# EAGLE board femtoBeacon_r2.0.2_PANEL_1x5 (EAGLE 7.6.0), part 1 of 2
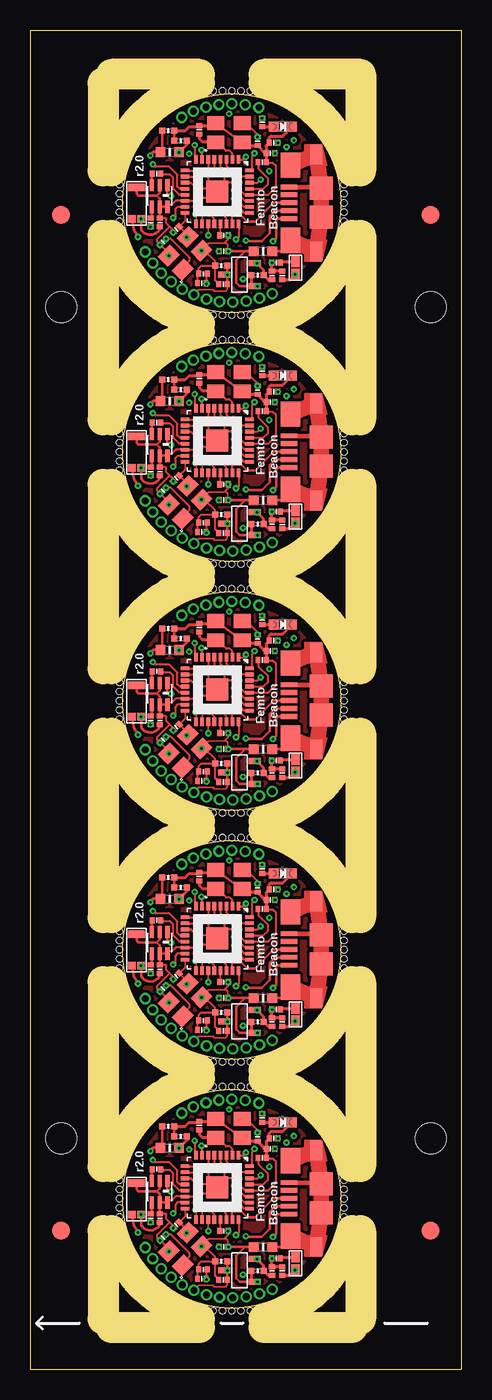
[diagram p0: board, top side]
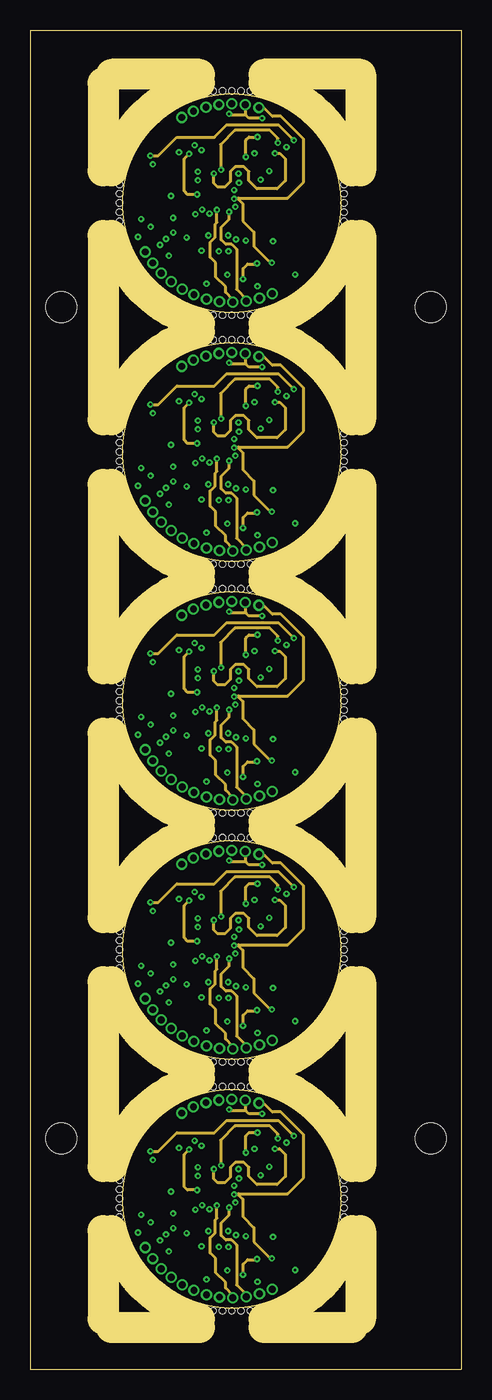
[diagram p1: board, inner layer Route2]
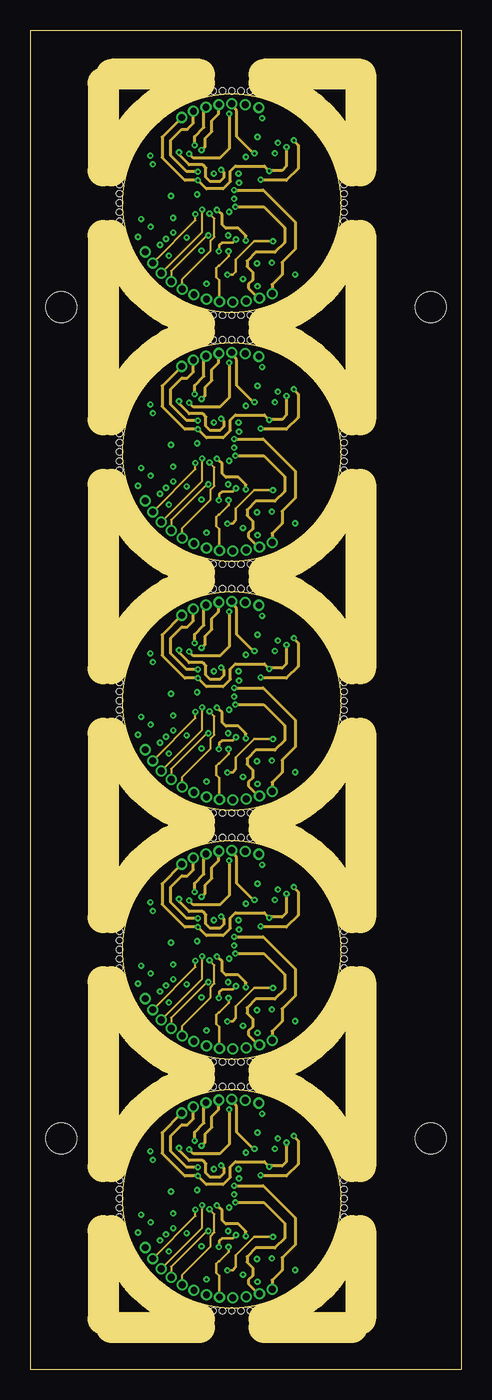
[diagram p2: board, inner layer Route15]
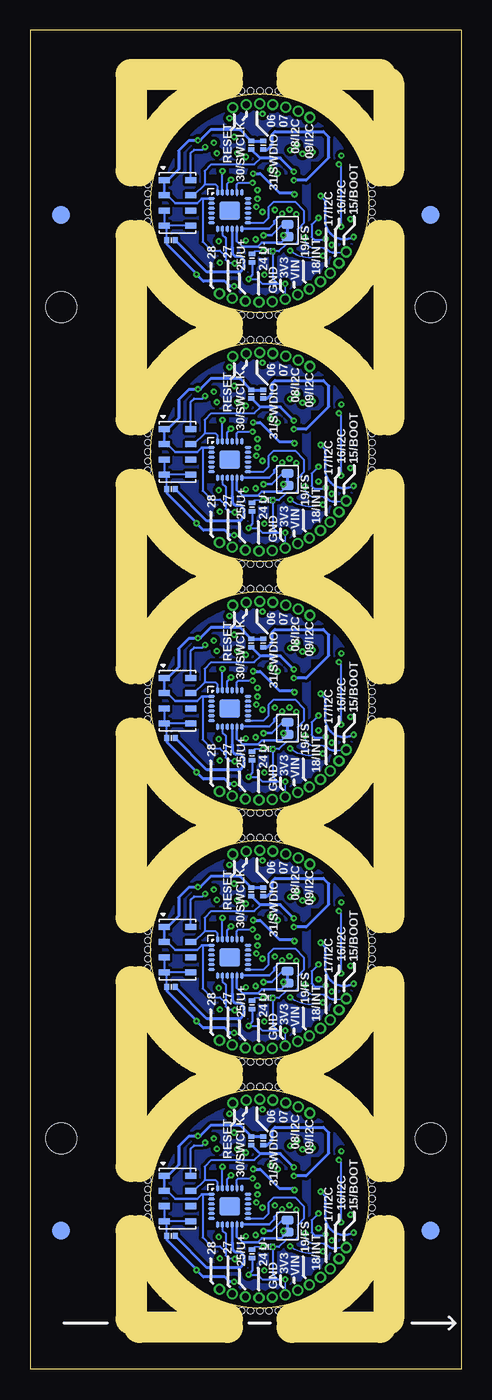
[diagram p3: board, bottom side, seen from below]

Size 35.56 x 110.49 mm. Coordinates in mm from the lower left corner, seen from the top.
Outline: 35.56,110.49 35.56,0 0,0 0,110.49 35.56,110.49
Outline: circle at 16.62,14.08 radius 9
Outline: circle at 16.62,34.62 radius 9
Outline: circle at 16.62,55.16 radius 9
Outline: circle at 16.62,75.7 radius 9
Outline: circle at 16.62,96.24 radius 9
Copper layers (1+2*15+16): Top 0.035mm / dielectric 0.7mm / Route2 0.035mm / dielectric 0.15mm / Route15 0.035mm / dielectric 0.2mm / Bottom 0.035mm
Design rules "AQS_custom_4layer": minimum track width 5mil, minimum drill 5mil, track to track 6mil, track to pad 6mil, pad to pad 6mil, via to via 6mil, smd to smd 1mil, copper to edge 15mil, drill to drill 6mil, minimum pad ring 7mil, minimum via ring 3mil, stop-mask expansion 2mil, vias tented up to drill 10mil, thermal gap 10mil
Holes 2.54 mm at 2.54,87.63 2.54,19.05 33.02,87.63 33.02,19.05
Holes 0.51 mm at 7.37,14.08 7.37,14.84 7.37,15.6 7.37,13.32 7.37,12.56 25.87,14.08 25.87,13.32 25.87,12.56 25.87,14.84 25.87,15.6 16.62,4.83 15.86,4.83 15.1,4.83 17.38,4.83 18.14,4.83 16.62,23.33 17.38,23.33 18.14,23.33 15.86,23.33 15.1,23.33 7.37,34.62 7.37,35.38 7.37,36.14 7.37,33.86 7.37,33.1 25.87,34.62 25.87,33.86 25.87,33.1 25.87,35.38 25.87,36.14 16.62,25.37 15.86,25.37 15.1,25.37 17.38,25.37 18.14,25.37 16.62,43.87 17.38,43.87 18.14,43.87 15.86,43.87 15.1,43.87 7.37,55.16 7.37,55.92 7.37,56.68 7.37,54.4 7.37,53.64 25.87,55.16 25.87,54.4 25.87,53.64 25.87,55.92 25.87,56.68 16.62,45.91 15.86,45.91 15.1,45.91 17.38,45.91 18.14,45.91 16.62,64.41 17.38,64.41 18.14,64.41 15.86,64.41 15.1,64.41 7.37,75.7 7.37,76.46 7.37,77.22 7.37,74.94 7.37,74.18 25.87,75.7 25.87,74.94 25.87,74.18 25.87,76.46 25.87,77.22 16.62,66.45 15.86,66.45 15.1,66.45 17.38,66.45 18.14,66.45 16.62,84.95 17.38,84.95 18.14,84.95 15.86,84.95 15.1,84.95 7.37,96.24 7.37,97 7.37,97.76 7.37,95.48 7.37,94.72 25.87,96.24 25.87,95.48 25.87,94.72 25.87,97 25.87,97.76 16.62,86.99 15.86,86.99 15.1,86.99 17.38,86.99 18.14,86.99 16.62,105.49 17.38,105.49 18.14,105.49 15.86,105.49 15.1,105.49
Milling: 36 lines

## Footprints (pad centres in the part's own frame; a part is rotated, then mirrored left to right if it is on the bottom)
ANT_BAR = smd 0.62 x 0.61: 1 -1.3,0.37; 2 -1.3,-0.38 | smd 0.62 x 1.36: 3 1.3,0
0805_BALUN = smd 1 x 0.35: 1 -0.9,0.65; 2 -0.9,0; 3 -0.9,-0.65; 4 0.9,-0.65; 5 0.9,0; 6 0.9,0.65
MS5611-01BA03 = smd 0.9 x 0.5: 1 -1.1,1.875; 2 -1.1,0.625; 3 -1.1,-0.625; 4 -1.1,-1.875; 5 1.1,-1.875; 6 1.1,-0.625; 7 1.1,0.625; 8 1.1,1.875
SPST_SMD = smd 0.889 x 0.699: 1 -0.508,0; 2 0.508,0
PART = smd 0.4 x 0.5: 1 -0.35,0; 2 0.35,0
_0402MP = smd 0.5 x 0.5: 1 -0.508,0; 2 0.508,0
_0603MP = smd 0.8 x 0.8: 1 -0.762,0; 2 0.762,0
FIDUCIAL_1MM = smd 1.5 x 1.5: 1 0,0
QFN32 = smd 0.7 x 0.3: 1 -2.65,1.75; 2 -2.65,1.25; 3 -2.65,0.75; 4 -2.65,0.25; 5 -2.65,-0.25; 6 -2.65,-0.75; 7 -2.65,-1.25; 8 -2.65,-1.75; 17 2.65,-1.75; 18 2.65,-1.25; 19 2.65,-0.75; 20 2.65,-0.25; 21 2.65,0.25; 22 2.65,0.75; 23 2.65,1.25; 24 2.65,1.75 | smd 0.3 x 0.7: 9 -1.75,-2.65; 10 -1.25,-2.65; 11 -0.75,-2.65; 12 -0.25,-2.65; 13 0.25,-2.65; 14 0.75,-2.65; 15 1.25,-2.65; 16 1.75,-2.65; 25 1.75,2.65; 26 1.25,2.65; 27 0.75,2.65; 28 0.25,2.65; 29 -0.25,2.65; 30 -0.75,2.65; 31 -1.25,2.65; 32 -1.75,2.65 | smd 1.8 x 1.8: 33 0,0
QFN_3X3MM = smd 0.6 x 0.25: P$1 -1.5,1; P$2 -1.5,0.6; P$3 -1.5,0.2; P$4 -1.5,-0.2; P$5 -1.5,-0.6; P$6 -1.5,-1; P$13 1.5,-1; P$14 1.5,-0.6; P$15 1.5,-0.2; P$16 1.5,0.2; P$17 1.5,0.6; P$18 1.5,1 | smd 0.25 x 0.6: P$7 -1,-1.5; P$8 -0.6,-1.5; P$9 -0.2,-1.5; P$10 0.2,-1.5; P$11 0.6,-1.5; P$12 1,-1.5; P$19 1,1.5; P$20 0.6,1.5; P$21 0.2,1.5; P$22 -0.2,1.5; P$23 -0.6,1.5; P$24 -1,1.5 | smd 1.7 x 1.54: P$25 0,0
MCP1700T-3302E/TT = smd 0.5 x 1: GND -0.95,-1.25; VIN 0,1.25; VOUT 0.95,-1.25
CHIPLED_0603_NOOUTLINE = smd 0.8 x 0.8: A 0,-0.75; C 0,0.75
SOLDER_JUMP_CLOSED = smd 0.762 x 1.016: 1 -0.508,0; 2 0.508,0
1X1_ROUND = drill 0.559 pad 0.864: P$1 0,0
USB_MICROB_PACKAGE = smd 0.4 x 1.35: 1 -1.3,1.47; 2 -0.64,1.47; 3 0,1.47; 4 0.66,1.47; 5 1.3,1.47 | smd 2.1 x 1.6: 6 -3.1,1.35; 11 3.1,1.35 | smd 1.6 x 1: 7 -4,-0.8; 10 4,-0.8 | smd 1.9 x 1.9: 8 -1.2,-1.2; 9 1.2,-1.2
TSX-3225 = smd 1.4 x 1.15: 1 -1.1,-0.8; 2 1.1,-0.8; 3 1.1,0.8; 4 -1.1,0.8

## Placement (x,y rotation side)
ANT1  PULSE_ANT_2.4GHZ  [ANT_BAR]  8.76,14.05 90 top
ANT2  PULSE_ANT_2.4GHZ  [ANT_BAR]  8.76,34.59 90 top
ANT3  PULSE_ANT_2.4GHZ  [ANT_BAR]  8.76,55.13 90 top
ANT4  PULSE_ANT_2.4GHZ  [ANT_BAR]  8.76,75.67 90 top
ANT5  PULSE_ANT_2.4GHZ  [ANT_BAR]  8.76,96.21 90 top
BAL  JOHANSON_2450BM15A0015E  [0805_BALUN]  10.67,14.66 270 top
BAL1  JOHANSON_2450BM15A0015E  [0805_BALUN]  10.67,35.2 270 top
BAL2  JOHANSON_2450BM15A0015E  [0805_BALUN]  10.67,55.74 270 top
BAL3  JOHANSON_2450BM15A0015E  [0805_BALUN]  10.67,76.28 270 top
BAL4  JOHANSON_2450BM15A0015E  [0805_BALUN]  10.67,96.82 270 top
BARO  MS5611-01BA03  [MS5611-01BA03]  23.41,14.09 0 bottom
BARO1  MS5611-01BA03  [MS5611-01BA03]  23.41,34.63 0 bottom
BARO2  MS5611-01BA03  [MS5611-01BA03]  23.41,55.17 0 bottom
BARO3  MS5611-01BA03  [MS5611-01BA03]  23.41,75.71 0 bottom
BARO4  MS5611-01BA03  [MS5611-01BA03]  23.41,96.25 0 bottom
BTN  DNP  [SPST_SMD]  21.87,8.74 270 top
BTN1  DNP  [SPST_SMD]  21.87,29.28 270 top
BTN2  DNP  [SPST_SMD]  21.87,49.82 270 top
BTN3  DNP  [SPST_SMD]  21.87,70.36 270 top
BTN4  DNP  [SPST_SMD]  21.87,90.9 270 top
C1  0.1uF  [PART]  20.78,8.1 270 top
C2  0.1uF  [PART]  15.98,11.4 0 top
C3  10pF  [PART]  10.95,10.87 45 top
C4  10pF  [PART]  12.04,11.89 225 top
C5  2.2uF  [_0402MP]  18.75,8.13 180 top
C6  2.2uF  [_0402MP]  15.75,8.91 180 top
C7  0.47uF  [PART]  15.9,7.39 180 top
C8  0.1uF  [PART]  20.07,19.05 180 top
C9  0.1uF  [PART]  19.13,17.45 0 top
C10  0.1uF  [PART]  14.25,8.23 180 top
C11  22pF, C0G, 5%  [PART]  10.41,16.51 180 top
C12  22pF, C0G, 5%  [PART]  9.93,12.47 90 top
C13  DNP  [PART]  10.69,12.47 90 top
C14  9pF  [PART]  13.94,20.12 270 top
C15  9pF  [PART]  18.75,19.18 270 top
C16  0.1uF  [PART]  15.95,10.1 0 top
C17  0.1uF  [PART]  19.81,18.19 180 top
C18  0.1uF  [PART]  20.78,28.64 270 top
C19  0.1uF  [PART]  15.98,31.94 0 top
C20  2.2uF  [_0402MP]  18.75,28.67 180 top
C21  10uF  [_0402MP]  11.38,20.04 180 top
C22  10uF  [_0402MP]  12.4,19.2 0 top
C23  2.2uF  [_0402MP]  15.75,29.45 180 top
C24  0.47uF  [PART]  15.9,27.93 180 top
C25  0.1uF  [PART]  17.27,30.07 90 bottom
C26  0.1uF  [PART]  20.07,39.59 180 top
C27  0.1uF  [PART]  19.13,37.99 0 top
C28  0.1uF  [PART]  15.95,30.64 0 top
C29  0.1uF  [PART]  17.27,9.53 90 bottom
C30  0.1uF  [PART]  15.95,10.1 0 bottom
C31  10nF  [PART]  14.15,7.47 0 top
C32  0.1uF  [PART]  23.95,11 180 bottom
C33  0.1uF  [PART]  19.81,38.73 180 top
C34  10uF  [_0402MP]  11.38,40.58 180 top
C35  10uF  [_0402MP]  12.4,39.74 0 top
C36  0.1uF  [PART]  14.25,28.77 180 top
C37  10pF  [PART]  10.95,31.41 45 top
C38  10pF  [PART]  12.04,32.43 225 top
C39  22pF, C0G, 5%  [PART]  10.41,37.05 180 top
C40  22pF, C0G, 5%  [PART]  9.93,33.01 90 top
C41  DNP  [PART]  10.69,33.01 90 top
C42  9pF  [PART]  13.94,40.66 270 top
C43  9pF  [PART]  18.75,39.72 270 top
C44  10nF  [PART]  14.15,28.01 0 top
C45  0.1uF  [PART]  15.95,30.64 0 bottom
C46  0.1uF  [PART]  23.95,31.54 180 bottom
C47  0.1uF  [PART]  20.78,49.18 270 top
C48  0.1uF  [PART]  15.98,52.48 0 top
C49  2.2uF  [_0402MP]  18.75,49.21 180 top
C50  2.2uF  [_0402MP]  15.75,49.99 180 top
C51  0.47uF  [PART]  15.9,48.47 180 top
C52  0.1uF  [PART]  17.27,50.61 90 bottom
C53  0.1uF  [PART]  20.07,60.13 180 top
C54  0.1uF  [PART]  19.13,58.53 0 top
C55  0.1uF  [PART]  15.95,51.18 0 top
C56  0.1uF  [PART]  19.81,59.27 180 top
C57  10uF  [_0402MP]  11.38,61.12 180 top
C58  10uF  [_0402MP]  12.4,60.28 0 top
C59  0.1uF  [PART]  14.25,49.31 180 top
C60  10pF  [PART]  10.95,51.95 45 top
C61  10pF  [PART]  12.04,52.97 225 top
C62  22pF, C0G, 5%  [PART]  10.41,57.59 180 top
C63  22pF, C0G, 5%  [PART]  9.93,53.55 90 top
C64  DNP  [PART]  10.69,53.55 90 top
C65  9pF  [PART]  13.94,61.2 270 top
C66  9pF  [PART]  18.75,60.26 270 top
C67  10nF  [PART]  14.15,48.55 0 top
C68  0.1uF  [PART]  15.95,51.18 0 bottom
C69  0.1uF  [PART]  23.95,52.08 180 bottom
C70  0.1uF  [PART]  20.78,69.72 270 top
C71  0.1uF  [PART]  15.98,73.02 0 top
C72  2.2uF  [_0402MP]  18.75,69.75 180 top
C73  2.2uF  [_0402MP]  15.75,70.53 180 top
C74  0.47uF  [PART]  15.9,69.01 180 top
C75  0.1uF  [PART]  17.27,71.15 90 bottom
C76  0.1uF  [PART]  20.07,80.67 180 top
C77  0.1uF  [PART]  19.13,79.07 0 top
C78  0.1uF  [PART]  15.95,71.72 0 top
C79  0.1uF  [PART]  19.81,79.81 180 top
C80  10uF  [_0402MP]  11.38,81.66 180 top
C81  10uF  [_0402MP]  12.4,80.82 0 top
C82  0.1uF  [PART]  14.25,69.85 180 top
C83  10pF  [PART]  10.95,72.49 45 top
C84  10pF  [PART]  12.04,73.51 225 top
C85  22pF, C0G, 5%  [PART]  10.41,78.13 180 top
C86  22pF, C0G, 5%  [PART]  9.93,74.09 90 top
C87  DNP  [PART]  10.69,74.09 90 top
C88  9pF  [PART]  13.94,81.74 270 top
C89  9pF  [PART]  18.75,80.8 270 top
C90  10nF  [PART]  14.15,69.09 0 top
C91  0.1uF  [PART]  15.95,71.72 0 bottom
C92  0.1uF  [PART]  23.95,72.62 180 bottom
C93  0.1uF  [PART]  20.78,90.26 270 top
C94  0.1uF  [PART]  15.98,93.56 0 top
C95  2.2uF  [_0402MP]  18.75,90.29 180 top
C96  2.2uF  [_0402MP]  15.75,91.07 180 top
C97  0.47uF  [PART]  15.9,89.55 180 top
C98  0.1uF  [PART]  17.27,91.69 90 bottom
C99  0.1uF  [PART]  20.07,101.21 180 top
C100  0.1uF  [PART]  19.13,99.61 0 top
C101  0.1uF  [PART]  15.95,92.26 0 top
C102  0.1uF  [PART]  19.81,100.35 180 top
C103  10uF  [_0402MP]  11.38,102.2 180 top
C104  10uF  [_0402MP]  12.4,101.36 0 top
C105  0.1uF  [PART]  14.25,90.39 180 top
C106  10pF  [PART]  10.95,93.03 45 top
C107  10pF  [PART]  12.04,94.05 225 top
C108  22pF, C0G, 5%  [PART]  10.41,98.67 180 top
C109  22pF, C0G, 5%  [PART]  9.93,94.63 90 top
C110  DNP  [PART]  10.69,94.63 90 top
C111  9pF  [PART]  13.94,102.28 270 top
C112  9pF  [PART]  18.75,101.34 270 top
C113  10nF  [PART]  14.15,89.63 0 top
C114  0.1uF  [PART]  15.95,92.26 0 bottom
C115  0.1uF  [PART]  23.95,93.16 180 bottom
FB1  [_0603MP]  19.2,10.08 180 top
FB2  [_0603MP]  19.2,30.62 180 top
FB3  [_0603MP]  19.2,51.16 180 top
FB4  [_0603MP]  19.2,71.7 180 top
FB5  [_0603MP]  19.2,92.24 180 top
FID1  [FIDUCIAL_1MM]  2.54,11.43 0 top
FID2  [FIDUCIAL_1MM]  2.54,95.25 0 top
FID3  [FIDUCIAL_1MM]  33.02,95.25 0 top
FID4  [FIDUCIAL_1MM]  33.02,11.43 0 top
FID5  [FIDUCIAL_1MM]  2.54,11.43 0 bottom
FID6  [FIDUCIAL_1MM]  2.54,95.25 0 bottom
FID7  [FIDUCIAL_1MM]  33.02,95.25 0 bottom
FID8  [FIDUCIAL_1MM]  33.02,11.43 0 bottom
IC  ATSAMR21E18A-MUT  [QFN32]  15.43,15 270 top
IC1  ATSAMR21E18A-MUT  [QFN32]  15.43,35.54 270 top
IC2  ATSAMR21E18A-MUT  [QFN32]  15.43,56.08 270 top
IC3  ATSAMR21E18A-MUT  [QFN32]  15.43,76.62 270 top
IC4  ATSAMR21E18A-MUT  [QFN32]  15.43,97.16 270 top
IMU  MPU-9250  [QFN_3X3MM]  19.11,13.45 0 bottom
IMU1  MPU-9250  [QFN_3X3MM]  19.11,33.98 0 bottom
IMU2  MPU-9250  [QFN_3X3MM]  19.11,54.53 0 bottom
IMU3  MPU-9250  [QFN_3X3MM]  19.11,75.06 0 bottom
IMU4  MPU-9250  [QFN_3X3MM]  19.11,95.61 0 bottom
L1  10uH  [_0603MP]  11.51,38.8 0 top
L2  10uH  [_0603MP]  11.51,59.34 0 top
L3  10uH  [_0603MP]  11.51,79.88 0 top
L4  10uH  [_0603MP]  11.51,100.42 0 top
L6  10uH  [_0603MP]  11.51,18.26 0 top
LDO_VREG  MCP1700T-3302E/TT  [MCP1700T-3302E/TT]  17.26,8.15 90 top
LDO_VREG1  MCP1700T-3302E/TT  [MCP1700T-3302E/TT]  17.26,28.69 90 top
LDO_VREG2  MCP1700T-3302E/TT  [MCP1700T-3302E/TT]  17.26,49.23 90 top
LDO_VREG3  MCP1700T-3302E/TT  [MCP1700T-3302E/TT]  17.26,69.77 90 top
LDO_VREG4  MCP1700T-3302E/TT  [MCP1700T-3302E/TT]  17.26,90.31 90 top
LED1  BLUE  [CHIPLED_0603_NOOUTLINE]  20.83,40.91 270 top
LED2  BLUE  [CHIPLED_0603_NOOUTLINE]  20.83,20.37 270 top
LED3  BLUE  [CHIPLED_0603_NOOUTLINE]  20.83,61.45 270 top
LED4  BLUE  [CHIPLED_0603_NOOUTLINE]  20.83,81.99 270 top
LED5  BLUE  [CHIPLED_0603_NOOUTLINE]  20.83,102.53 270 top
R1  330  [PART]  20.27,9.14 180 top
R2  10K  [PART]  19.94,8.1 270 top
R3  330  [PART]  20.27,29.68 180 top
R4  330  [PART]  19.13,20.73 270 top
R5  10K  [PART]  19.94,28.64 270 top
R6  330  [PART]  19.13,41.27 270 top
R7  2.2K  [PART]  17.32,39.39 90 bottom
R8  2.2K  [PART]  17.32,18.85 90 bottom
R9  2.2K  [PART]  16.36,18.85 90 bottom
R10  2.2K  [PART]  16.36,39.39 90 bottom
R11  330  [PART]  20.27,50.22 180 top
R12  10K  [PART]  19.94,49.18 270 top
R13  330  [PART]  19.13,61.81 270 top
R14  2.2K  [PART]  17.32,59.93 90 bottom
R15  2.2K  [PART]  16.36,59.93 90 bottom
R16  330  [PART]  20.27,70.76 180 top
R17  10K  [PART]  19.94,69.72 270 top
R18  330  [PART]  19.13,82.35 270 top
R19  2.2K  [PART]  17.32,80.47 90 bottom
R20  2.2K  [PART]  16.36,80.47 90 bottom
R21  330  [PART]  20.27,91.3 180 top
R22  10K  [PART]  19.94,90.26 270 top
R23  330  [PART]  19.13,102.89 270 top
R24  2.2K  [PART]  17.32,101.01 90 bottom
R25  2.2K  [PART]  16.36,101.01 90 bottom
SJ1  SOLDER_JUMPER_CLOSED  [SOLDER_JUMP_CLOSED]  14.35,11.81 270 bottom
SJ2  SOLDER_JUMPER_CLOSED  [SOLDER_JUMP_CLOSED]  14.35,32.35 270 bottom
SJ3  SOLDER_JUMPER_CLOSED  [SOLDER_JUMP_CLOSED]  14.35,52.89 270 bottom
SJ4  SOLDER_JUMPER_CLOSED  [SOLDER_JUMP_CLOSED]  14.35,73.43 270 bottom
SJ5  SOLDER_JUMPER_CLOSED  [SOLDER_JUMP_CLOSED]  14.35,93.97 270 bottom
U$1  1X1_ROUND  [1X1_ROUND]  13.5,6.51 0 top
U$2  1X1_ROUND  [1X1_ROUND]  15.6,5.95 0 top
U$3  1X1_ROUND  [1X1_ROUND]  13.5,27.05 0 top
U$4  1X1_ROUND  [1X1_ROUND]  15.6,26.49 0 top
U$5  1X1_ROUND  [1X1_ROUND]  14.54,6.15 0 top
U$6  1X1_ROUND  [1X1_ROUND]  14.54,26.69 0 top
U$7  1X1_ROUND  [1X1_ROUND]  18.91,6.23 0 top
U$8  1X1_ROUND  [1X1_ROUND]  12.53,27.52 0 top
U$9  1X1_ROUND  [1X1_ROUND]  16.7,5.89 0 top
U$10  1X1_ROUND  [1X1_ROUND]  17.81,5.97 0 top
U$11  1X1_ROUND  [1X1_ROUND]  11.62,28.12 0 top
U$12  1X1_ROUND  [1X1_ROUND]  10.81,28.83 0 top
U$13  1X1_ROUND  [1X1_ROUND]  10.1,29.67 0 top
U$14  1X1_ROUND  [1X1_ROUND]  9.49,30.58 0 top
U$15  1X1_ROUND  [1X1_ROUND]  12.49,41.68 0 top
U$16  1X1_ROUND  [1X1_ROUND]  13.46,42.18 0 top
U$17  1X1_ROUND  [1X1_ROUND]  14.49,42.53 0 top
U$18  1X1_ROUND  [1X1_ROUND]  18.86,42.5 0 top
U$19  1X1_ROUND  [1X1_ROUND]  17.74,42.72 0 top
U$20  1X1_ROUND  [1X1_ROUND]  16.62,42.82 0 top
U$21  1X1_ROUND  [1X1_ROUND]  18.91,26.77 0 top
U$22  1X1_ROUND  [1X1_ROUND]  19.95,27.14 0 top
U$23  1X1_ROUND  [1X1_ROUND]  15.56,42.75 0 top
U$24  1X1_ROUND  [1X1_ROUND]  16.7,26.43 0 top
U$25  1X1_ROUND  [1X1_ROUND]  17.81,26.51 0 top
U$26  1X1_ROUND  [1X1_ROUND]  13.5,47.59 0 top
U$27  1X1_ROUND  [1X1_ROUND]  15.6,47.03 0 top
U$28  1X1_ROUND  [1X1_ROUND]  14.54,47.23 0 top
U$29  1X1_ROUND  [1X1_ROUND]  12.53,48.06 0 top
U$30  1X1_ROUND  [1X1_ROUND]  11.62,48.66 0 top
U$31  1X1_ROUND  [1X1_ROUND]  10.81,49.37 0 top
U$32  1X1_ROUND  [1X1_ROUND]  10.1,50.21 0 top
U$33  1X1_ROUND  [1X1_ROUND]  9.49,51.12 0 top
U$34  1X1_ROUND  [1X1_ROUND]  12.49,62.22 0 top
U$35  1X1_ROUND  [1X1_ROUND]  12.53,6.98 0 top
U$36  1X1_ROUND  [1X1_ROUND]  11.62,7.58 0 top
U$37  1X1_ROUND  [1X1_ROUND]  10.81,8.29 0 top
U$38  1X1_ROUND  [1X1_ROUND]  10.1,9.13 0 top
U$39  1X1_ROUND  [1X1_ROUND]  9.49,10.04 0 top
U$40  1X1_ROUND  [1X1_ROUND]  13.46,62.72 0 top
U$41  1X1_ROUND  [1X1_ROUND]  12.49,21.14 0 top
U$42  1X1_ROUND  [1X1_ROUND]  13.46,21.64 0 top
U$43  1X1_ROUND  [1X1_ROUND]  14.49,21.99 0 top
U$44  1X1_ROUND  [1X1_ROUND]  14.49,63.07 0 top
U$45  1X1_ROUND  [1X1_ROUND]  18.86,21.96 0 top
U$46  1X1_ROUND  [1X1_ROUND]  17.74,22.18 0 top
U$47  1X1_ROUND  [1X1_ROUND]  16.62,22.28 0 top
U$48  1X1_ROUND  [1X1_ROUND]  19.95,6.6 0 top
U$49  1X1_ROUND  [1X1_ROUND]  18.86,63.04 0 top
U$50  1X1_ROUND  [1X1_ROUND]  17.74,63.26 0 top
U$51  1X1_ROUND  [1X1_ROUND]  16.62,63.36 0 top
U$52  1X1_ROUND  [1X1_ROUND]  18.91,47.31 0 top
U$53  1X1_ROUND  [1X1_ROUND]  19.95,47.68 0 top
U$54  1X1_ROUND  [1X1_ROUND]  15.56,22.21 0 top
U$55  1X1_ROUND  [1X1_ROUND]  15.56,63.29 0 top
U$56  1X1_ROUND  [1X1_ROUND]  16.7,46.97 0 top
U$57  1X1_ROUND  [1X1_ROUND]  17.81,47.05 0 top
U$58  1X1_ROUND  [1X1_ROUND]  13.5,68.13 0 top
U$59  1X1_ROUND  [1X1_ROUND]  15.6,67.57 0 top
U$60  1X1_ROUND  [1X1_ROUND]  14.54,67.77 0 top
U$61  1X1_ROUND  [1X1_ROUND]  12.53,68.6 0 top
U$62  1X1_ROUND  [1X1_ROUND]  11.62,69.2 0 top
U$63  1X1_ROUND  [1X1_ROUND]  10.81,69.91 0 top
U$64  1X1_ROUND  [1X1_ROUND]  10.1,70.75 0 top
U$65  1X1_ROUND  [1X1_ROUND]  9.49,71.66 0 top
U$66  1X1_ROUND  [1X1_ROUND]  12.49,82.76 0 top
U$67  1X1_ROUND  [1X1_ROUND]  13.46,83.26 0 top
U$68  1X1_ROUND  [1X1_ROUND]  14.49,83.61 0 top
U$69  1X1_ROUND  [1X1_ROUND]  18.86,83.58 0 top
U$70  1X1_ROUND  [1X1_ROUND]  17.74,83.8 0 top
U$71  1X1_ROUND  [1X1_ROUND]  16.62,83.9 0 top
U$72  1X1_ROUND  [1X1_ROUND]  18.91,67.85 0 top
U$73  1X1_ROUND  [1X1_ROUND]  19.95,68.22 0 top
U$74  1X1_ROUND  [1X1_ROUND]  15.56,83.83 0 top
U$75  1X1_ROUND  [1X1_ROUND]  16.7,67.51 0 top
U$76  1X1_ROUND  [1X1_ROUND]  17.81,67.59 0 top
U$77  1X1_ROUND  [1X1_ROUND]  13.5,88.67 0 top
U$78  1X1_ROUND  [1X1_ROUND]  15.6,88.11 0 top
U$79  1X1_ROUND  [1X1_ROUND]  14.54,88.31 0 top
U$80  1X1_ROUND  [1X1_ROUND]  12.53,89.14 0 top
U$81  1X1_ROUND  [1X1_ROUND]  11.62,89.74 0 top
U$82  1X1_ROUND  [1X1_ROUND]  10.81,90.45 0 top
U$83  1X1_ROUND  [1X1_ROUND]  10.1,91.29 0 top
U$84  1X1_ROUND  [1X1_ROUND]  9.49,92.2 0 top
U$85  1X1_ROUND  [1X1_ROUND]  12.49,103.3 0 top
U$86  1X1_ROUND  [1X1_ROUND]  13.46,103.8 0 top
U$87  1X1_ROUND  [1X1_ROUND]  14.49,104.15 0 top
U$88  1X1_ROUND  [1X1_ROUND]  18.86,104.12 0 top
U$89  1X1_ROUND  [1X1_ROUND]  17.74,104.34 0 top
U$90  1X1_ROUND  [1X1_ROUND]  16.62,104.44 0 top
U$91  1X1_ROUND  [1X1_ROUND]  18.91,88.39 0 top
U$92  1X1_ROUND  [1X1_ROUND]  19.95,88.76 0 top
U$93  1X1_ROUND  [1X1_ROUND]  15.56,104.37 0 top
U$94  1X1_ROUND  [1X1_ROUND]  16.7,88.05 0 top
U$95  1X1_ROUND  [1X1_ROUND]  17.81,88.13 0 top
USB  USB_MICROB  [USB_MICROB_PACKAGE]  22.8,14.1 90 top
USB1  USB_MICROB  [USB_MICROB_PACKAGE]  22.8,34.64 90 top
USB2  USB_MICROB  [USB_MICROB_PACKAGE]  22.8,55.18 90 top
USB3  USB_MICROB  [USB_MICROB_PACKAGE]  22.8,75.72 90 top
USB4  USB_MICROB  [USB_MICROB_PACKAGE]  22.8,96.26 90 top
XOSC  12MHz  [TSX-3225]  12.78,9.93 45 top
XOSC1  12MHz  [TSX-3225]  12.78,30.47 45 top
XOSC2  12MHz  [TSX-3225]  12.78,51.01 45 top
XOSC3  12MHz  [TSX-3225]  12.78,71.55 45 top
XOSC4  12MHz  [TSX-3225]  12.78,92.09 45 top
XOSCRF  16MHz  [TSX-3225]  16.39,19.88 0 top
XOSCRF1  16MHz  [TSX-3225]  16.39,40.42 0 top
XOSCRF2  16MHz  [TSX-3225]  16.39,60.96 0 top
XOSCRF3  16MHz  [TSX-3225]  16.39,81.5 0 top
XOSCRF4  16MHz  [TSX-3225]  16.39,102.04 0 top

## Library data of the parts
ANT1-ANT5 = bar_antenna
BAL BAL1-BAL4 = balun
BARO BARO1-BARO4 = freeimu
BTN BTN1-BTN4 USB USB1-USB4 = femtoduino
C1-C4 C8-C19 C25-C33 C36-C48 C52-C56 C59-C71 C75-C79 C82-C94 C98-C102 C105-C115 = parts_0201; DIGIKEY_PART: 490-3194-1-ND
C5 C6 C20-C23 C34 C35 C49 C50 C57 C58 C72 C73 C80 C81 C95 C96 C103 C104 FB1-FB5 L1-L4 L6 LED1-LED5 = microbuilder
C7 C24 C51 C74 C97 R1-R25 = parts_0201
FID1-FID8 = adafruit
IC IC1-IC4 = atmel-samr21
IMU IMU1-IMU4 = mpu9250
LDO_VREG LDO_VREG1-LDO_VREG4 = MCP1700T-3302E_TT
SJ1-SJ5 = solder-jumpers
U$1-U$95 = pins_1.27mm_pitch
XOSC XOSC1-XOSC4 XOSCRF XOSCRF1-XOSCRF4 = crystals

## Nets
3.3V1: BARO.1 BARO.2 C5.1 C10.1 C16.1 C21.2 C29.1 C30.2 C31.2 IC.24 IC.30 IMU.P$1 IMU.P$8 IMU.P$13 IMU.P$22 L6.1 LDO_VREG.VOUT R2.2 R8.2 R9.2 U$5.P$1
3.3V2: BARO1.1 BARO1.2 C20.1 C25.1 C28.1 C34.2 C36.1 C44.2 C45.2 IC1.24 IC1.30 IMU1.P$1 IMU1.P$8 IMU1.P$13 IMU1.P$22 L1.1 LDO_VREG1.VOUT R5.2 R7.2 R10.2 U$6.P$1
3.3V3: BARO2.1 BARO2.2 C49.1 C52.1 C55.1 C57.2 C59.1 C67.2 C68.2 IC2.24 IC2.30 IMU2.P$1 IMU2.P$8 IMU2.P$13 IMU2.P$22 L2.1 LDO_VREG2.VOUT R12.2 R14.2 R15.2 U$28.P$1
3.3V4: BARO3.1 BARO3.2 C72.1 C75.1 C78.1 C80.2 C82.1 C90.2 C91.2 IC3.24 IC3.30 IMU3.P$1 IMU3.P$8 IMU3.P$13 IMU3.P$22 L3.1 LDO_VREG3.VOUT R17.2 R19.2 R20.2 U$60.P$1
3.3V5: BARO4.1 BARO4.2 C95.1 C98.1 C101.1 C103.2 C105.1 C113.2 C114.2 IC4.24 IC4.30 IMU4.P$1 IMU4.P$8 IMU4.P$13 IMU4.P$22 L4.1 LDO_VREG4.VOUT R22.2 R24.2 R25.2 U$79.P$1
ANT_OUT: ANT1.1 BAL.1
ANT_OUT1: ANT2.1 BAL1.1
ANT_OUT2: ANT3.1 BAL2.1
ANT_OUT3: ANT4.1 BAL3.1
ANT_OUT4: ANT5.1 BAL4.1
AVDD: C17.1 IC.5
AVDD1: C33.1 IC1.5
AVDD2: C56.1 IC2.5
AVDD3: C79.1 IC3.5
AVDD4: C102.1 IC4.5
DVDD: C2.1 IC.21
DVDD1: C19.1 IC1.21
DVDD2: C48.1 IC2.21
DVDD3: C71.1 IC3.21
DVDD4: C94.1 IC4.21
GND: ANT1.3 BAL.2 BAL.5 BAL.6 BARO.3 BARO.4 BARO.5 BTN.2 C1.2 C2.2 C3.1 C4.2 C5.2 C6.2 C7.2 C8.2 C9.2 C10.2 C13.2 C14.1 C15.2 C16.2 C17.2 C21.1 C22.1 C29.2 C30.1 C31.1 C32.2 FB1.2 IC.3 IC.6 IC.11 IC.14 IC.28 IC.33 IMU.P$20 LDO_VREG.GND LED2.C SJ1.1 U$2.P$1 XOSC.2 XOSC.4 XOSCRF.2 XOSCRF.4
GND1: ANT2.3 BAL1.2 BAL1.5 BAL1.6 BARO1.3 BARO1.4 BARO1.5 BTN1.2 C18.2 C19.2 C20.2 C23.2 C24.2 C25.2 C26.2 C27.2 C28.2 C33.2 C34.1 C35.1 C36.2 C37.1 C38.2 C41.2 C42.1 C43.2 C44.1 C45.1 C46.2 FB2.2 IC1.3 IC1.6 IC1.11 IC1.14 IC1.28 IC1.33 IMU1.P$20 LDO_VREG1.GND LED1.C SJ2.1 U$4.P$1 XOSC1.2 XOSC1.4 XOSCRF1.2 XOSCRF1.4
GND2: ANT3.3 BAL2.2 BAL2.5 BAL2.6 BARO2.3 BARO2.4 BARO2.5 BTN2.2 C47.2 C48.2 C49.2 C50.2 C51.2 C52.2 C53.2 C54.2 C55.2 C56.2 C57.1 C58.1 C59.2 C60.1 C61.2 C64.2 C65.1 C66.2 C67.1 C68.1 C69.2 FB3.2 IC2.3 IC2.6 IC2.11 IC2.14 IC2.28 IC2.33 IMU2.P$20 LDO_VREG2.GND LED3.C SJ3.1 U$27.P$1 XOSC2.2 XOSC2.4 XOSCRF2.2 XOSCRF2.4
GND3: ANT4.3 BAL3.2 BAL3.5 BAL3.6 BARO3.3 BARO3.4 BARO3.5 BTN3.2 C70.2 C71.2 C72.2 C73.2 C74.2 C75.2 C76.2 C77.2 C78.2 C79.2 C80.1 C81.1 C82.2 C83.1 C84.2 C87.2 C88.1 C89.2 C90.1 C91.1 C92.2 FB4.2 IC3.3 IC3.6 IC3.11 IC3.14 IC3.28 IC3.33 IMU3.P$20 LDO_VREG3.GND LED4.C SJ4.1 U$59.P$1 XOSC3.2 XOSC3.4 XOSCRF3.2 XOSCRF3.4
GND4: ANT5.3 BAL4.2 BAL4.5 BAL4.6 BARO4.3 BARO4.4 BARO4.5 BTN4.2 C93.2 C94.2 C95.2 C96.2 C97.2 C98.2 C99.2 C100.2 C101.2 C102.2 C103.1 C104.1 C105.2 C106.1 C107.2 C110.2 C111.1 C112.2 C113.1 C114.1 C115.2 FB5.2 IC4.3 IC4.6 IC4.11 IC4.14 IC4.28 IC4.33 IMU4.P$20 LDO_VREG4.GND LED5.C SJ5.1 U$78.P$1 XOSC4.2 XOSC4.4 XOSCRF4.2 XOSCRF4.4
N$1: BAL.3 C11.2
N$2: ANT1.2 C13.1
N$3: BAL.4 C12.2
N$4: C32.1 IMU.P$10
N$5: FB1.1 USB.5 USB.6 USB.7 USB.8 USB.9 USB.10 USB.11
N$7: BTN1.1 R3.1
N$8: LED1.A R6.2
N$9: BAL1.3 C39.2
N$10: BAL1.4 C40.2
N$11: ANT2.2 C41.1
N$12: C46.1 IMU1.P$10
N$13: LED2.A R4.2
N$14: FB2.1 USB1.5 USB1.6 USB1.7 USB1.8 USB1.9 USB1.10 USB1.11
N$16: BTN2.1 R11.1
N$17: LED3.A R13.2
N$18: BAL2.3 C62.2
N$19: BAL2.4 C63.2
N$20: ANT3.2 C64.1
N$21: C69.1 IMU2.P$10
N$22: FB3.1 USB2.5 USB2.6 USB2.7 USB2.8 USB2.9 USB2.10 USB2.11
N$24: BTN3.1 R16.1
N$25: LED4.A R18.2
N$26: BTN.1 R1.1
N$27: BAL3.3 C85.2
N$28: BAL3.4 C86.2
N$29: ANT4.2 C87.1
N$30: C92.1 IMU3.P$10
N$31: FB4.1 USB3.5 USB3.6 USB3.7 USB3.8 USB3.9 USB3.10 USB3.11
N$33: BTN4.1 R21.1
N$34: LED5.A R23.2
N$35: BAL4.3 C108.2
N$36: BAL4.4 C109.2
N$37: ANT5.2 C110.1
N$38: C115.1 IMU4.P$10
N$39: FB5.1 USB4.5 USB4.6 USB4.7 USB4.8 USB4.9 USB4.10 USB4.11
PA1: IC1.25 U$21.P$1
PA2: IC1.27 U$22.P$1
PA3: IC2.25 U$52.P$1
PA4: IC2.27 U$53.P$1
PA5: IC3.25 U$72.P$1
PA6: IC3.27 U$73.P$1
PA06/A0: IC.7 U$54.P$1
PA06/A1: IC1.7 U$23.P$1
PA06/A2: IC2.7 U$55.P$1
PA06/A3: IC3.7 U$74.P$1
PA06/A4: IC4.7 U$93.P$1
PA7: IC4.25 U$91.P$1
PA07/A1: IC.8 U$43.P$1
PA07/A2: IC1.8 U$17.P$1
PA07/A3: IC2.8 U$44.P$1
PA07/A4: IC3.8 U$68.P$1
PA07/A5: IC4.8 U$87.P$1
PA8: IC4.27 U$92.P$1
PA08/I2C/SDA: BARO.7 IC.9 IMU.P$24 R8.1 U$42.P$1
PA08/I2C/SDA1: BARO1.7 IC1.9 IMU1.P$24 R7.1 U$16.P$1
PA08/I2C/SDA2: BARO2.7 IC2.9 IMU2.P$24 R14.1 U$40.P$1
PA08/I2C/SDA3: BARO3.7 IC3.9 IMU3.P$24 R19.1 U$67.P$1
PA08/I2C/SDA4: BARO4.7 IC4.9 IMU4.P$24 R24.1 U$86.P$1
PA09/I2C/SCL: BARO.8 IC.10 IMU.P$23 R9.1 U$41.P$1
PA09/I2C/SCL1: BARO1.8 IC1.10 IMU1.P$23 R10.1 U$15.P$1
PA09/I2C/SCL2: BARO2.8 IC2.10 IMU2.P$23 R15.1 U$34.P$1
PA09/I2C/SCL3: BARO3.8 IC3.10 IMU3.P$23 R20.1 U$66.P$1
PA09/I2C/SCL4: BARO4.8 IC4.10 IMU4.P$23 R25.1 U$85.P$1
PA14/XIN_MC/RX: C3.2 IC.15 XOSC.1
PA14/XIN_MC/RX1: C37.2 IC1.15 XOSC1.1
PA14/XIN_MC/RX2: C60.2 IC2.15 XOSC2.1
PA14/XIN_MC/RX3: C83.2 IC3.15 XOSC3.1
PA14/XIN_MC/RX4: C106.2 IC4.15 XOSC4.1
PA15/XOUT_MC/TX: C4.1 IC.16 U$39.P$1 XOSC.3
PA15/XOUT_MC/TX1: C38.1 IC1.16 U$14.P$1 XOSC1.3
PA15/XOUT_MC/TX2: C61.1 IC2.16 U$33.P$1 XOSC2.3
PA15/XOUT_MC/TX3: C84.1 IC3.16 U$65.P$1 XOSC3.3
PA15/XOUT_MC/TX4: C107.1 IC4.16 U$84.P$1 XOSC4.3
PA16/I2C: IC.17 U$38.P$1
PA16/I2C1: IC1.17 U$13.P$1
PA16/I2C2: IC2.17 U$32.P$1
PA16/I2C3: IC3.17 U$64.P$1
PA16/I2C4: IC4.17 U$83.P$1
PA17/I2C: IC.18 U$37.P$1
PA17/I2C1: IC1.18 U$12.P$1
PA17/I2C2: IC2.18 U$31.P$1
PA17/I2C3: IC3.18 U$63.P$1
PA17/I2C4: IC4.18 U$82.P$1
PA18/FSYNC: IC.19 IMU.P$11 SJ1.2 U$36.P$1
PA18/FSYNC1: IC1.19 IMU1.P$11 SJ2.2 U$11.P$1
PA18/FSYNC2: IC2.19 IMU2.P$11 SJ3.2 U$30.P$1
PA18/FSYNC3: IC3.19 IMU3.P$11 SJ4.2 U$62.P$1
PA18/FSYNC4: IC4.19 IMU4.P$11 SJ5.2 U$81.P$1
PA19/INTA: IC.20 IMU.P$12 U$35.P$1
PA19/INTA1: IC1.20 IMU1.P$12 U$8.P$1
PA19/INTA2: IC2.20 IMU2.P$12 U$29.P$1
PA19/INTA3: IC3.20 IMU3.P$12 U$61.P$1
PA19/INTA4: IC4.20 IMU4.P$12 U$80.P$1
PA24/USBDM: IC.22 U$9.P$1 USB.2
PA24/USBDM1: IC1.22 U$24.P$1 USB1.2
PA24/USBDM2: IC2.22 U$56.P$1 USB2.2
PA24/USBDM3: IC3.22 U$75.P$1 USB3.2
PA24/USBDM4: IC4.22 U$94.P$1 USB4.2
PA25/USBDP: IC.23 U$10.P$1 USB.3
PA25/USBDP1: IC1.23 U$25.P$1 USB1.3
PA25/USBDP2: IC2.23 U$57.P$1 USB2.3
PA25/USBDP3: IC3.23 U$76.P$1 USB3.3
PA25/USBDP4: IC4.23 U$95.P$1 USB4.3
PA27: IC.25 U$7.P$1
PA28: IC.27 U$48.P$1
PA30/SWCLK: IC.31 R4.1 U$46.P$1
PA30/SWCLK1: IC1.31 R6.1 U$19.P$1
PA30/SWCLK2: IC2.31 R13.1 U$50.P$1
PA30/SWCLK3: IC3.31 R18.1 U$70.P$1
PA30/SWCLK4: IC4.31 R23.1 U$89.P$1
PA31/SWDIO: IC.32 U$47.P$1
PA31/SWDIO1: IC1.32 U$20.P$1
PA31/SWDIO2: IC2.32 U$51.P$1
PA31/SWDIO3: IC3.32 U$71.P$1
PA31/SWDIO4: IC4.32 U$90.P$1
RESET: C1.1 IC.26 R1.2 R2.1 U$45.P$1
RESET1: C18.1 IC1.26 R3.2 R5.1 U$18.P$1
RESET2: C47.1 IC2.26 R11.2 R12.1 U$49.P$1
RESET3: C70.1 IC3.26 R16.2 R17.1 U$69.P$1
RESET4: C93.1 IC4.26 R21.2 R22.1 U$88.P$1
RFN: C11.1 IC.13
RFN1: C39.1 IC1.13
RFN2: C62.1 IC2.13
RFN3: C85.1 IC3.13
RFN4: C108.1 IC4.13
RFP: C12.1 IC.12
RFP1: C40.1 IC1.12
RFP2: C63.1 IC2.12
RFP3: C86.1 IC3.12
RFP4: C109.1 IC4.12
VDDANA: C8.1 C22.2 IC.4 L6.2
VDDANA1: C26.1 C35.2 IC1.4 L1.2
VDDANA2: C53.1 C58.2 IC2.4 L2.2
VDDANA3: C76.1 C81.2 IC3.4 L3.2
VDDANA4: C99.1 C104.2 IC4.4 L4.2
VDDCORE: C9.1 IC.29
VDDCORE1: C27.1 IC1.29
VDDCORE2: C54.1 IC2.29
VDDCORE3: C77.1 IC3.29
VDDCORE4: C100.1 IC4.29
VIN: C6.1 C7.1 LDO_VREG.VIN U$1.P$1 USB.1
VIN1: C23.1 C24.1 LDO_VREG1.VIN U$3.P$1 USB1.1
VIN2: C50.1 C51.1 LDO_VREG2.VIN U$26.P$1 USB2.1
VIN3: C73.1 C74.1 LDO_VREG3.VIN U$58.P$1 USB3.1
VIN4: C96.1 C97.1 LDO_VREG4.VIN U$77.P$1 USB4.1
XTALIN: C14.2 IC.2 XOSCRF.1
XTALIN1: C42.2 IC1.2 XOSCRF1.1
XTALIN2: C65.2 IC2.2 XOSCRF2.1
XTALIN3: C88.2 IC3.2 XOSCRF3.1
XTALIN4: C111.2 IC4.2 XOSCRF4.1
XTALOUT: C15.1 IC.1 XOSCRF.3
XTALOUT1: C43.1 IC1.1 XOSCRF1.3
XTALOUT2: C66.1 IC2.1 XOSCRF2.3
XTALOUT3: C89.1 IC3.1 XOSCRF3.3
XTALOUT4: C112.1 IC4.1 XOSCRF4.3

## Tracks (layer width: path | path; a pad name or v marks a point on that pad's centre or on a via)
3.3V1  (via drill 0.2 pad 0.51)
  Top 0.14: C31.2 14.5,7.4 v14.53,7.42
  Top 0.152: C30.2 15.55,10.2 v15.55,10.1 | IC.24 17.18,11.27 v16.97,11.07 | C10.1 14.63,8.39 14.53,8.29 v14.53,7.42 | LDO_VREG.VOUT 18.68,9.11 v18.69,9.09 | IC.30 18.75,15.75 v19,16
  Top 0.203: C21.2 10.87,18.39
  Top 0.254: 10.87,18.39 L6.1 10.13,18.26 v9.91,17.98 | v18.69,9.09 19.25,8.53 C5.1 19.63,7.75 R2.2
  Route2 0.254: v9.91,17.98 10.57,17.98 12.09,19.51 15.19,19.51 16.2,20.52 20.47,20.52 v21.74,19.25 | v17.55,7.8 17.55,8.66 17.93,9.04 18.64,9.04 v18.69,9.09
  Route15 0.203: v15.55,10.1 15.6,10.15 15.6,10.6 15.82,10.82 16.71,10.82 v16.97,11.07
  Route15 0.254: v21.74,19.25 21.74,19.2 22.1,18.85 22.1,16.92 21.13,15.95 19.05,15.95 v19,16
  Bottom 0.14: v14.53,7.42 U$5.P$1 | v15.55,10.1 C30.2
  Bottom 0.152: 15.14,7.42 16.41,7.42 16.74,7.75 17.5,7.75 v17.55,7.8 17.27,8.15 C29.1 | 15.14,7.42 v14.53,7.42 | 15.14,7.42 15.55,7.83 v15.55,10.1 15.05,10.1 14.45,10.69 13.72,10.69 13.51,10.9 13.51,11.89 13.01,12.4 13.01,13.46 13.72,14.17 15.49,14.17 15.9,13.77 15.9,12.85 16.31,12.45 IMU.P$13 | IMU.P$8 19.71,11.48 19.46,11.23 19.46,9.7 | 19.46,9.7 19.46,9.4 19.15,9.09 v18.69,9.09 | IMU.P$22 19.31,15.69 v19,16 | 19.46,9.7 19.91,10.16 20.62,10.16 21.34,10.87 21.34,14.39 21.29,14.45
  Bottom 0.203: BARO.1 BARO.2 24.26,14.71 23.62,14.07 21.79,14.07 21.42,14.45 21.29,14.45 IMU.P$1
  Bottom 0.254: BARO.1 24.22,15.96 23.32,16.87 23.32,18.39 22.45,19.25 v21.74,19.25 21.54,19.25 20.68,20.12 18.24,20.12 R8.2 R9.2
3.3V2  (via drill 0.2 pad 0.51)
  Top 0.14: C44.2 14.5,27.94 v14.53,27.96
  Top 0.152: C45.2 15.55,30.74 v15.55,30.64 | IC1.24 17.18,31.81 v16.97,31.61 | C36.1 14.63,28.93 14.53,28.83 v14.53,27.96 | LDO_VREG1.VOUT 18.68,29.64 v18.69,29.63 | IC1.30 18.75,36.29 v19,36.54
  Top 0.203: C34.2 10.87,38.93
  Top 0.254: 10.87,38.93 L1.1 10.13,38.8 v9.91,38.52 | v18.69,29.63 19.25,29.07 C20.1 19.63,28.29 R5.2
  Route2 0.254: v9.91,38.52 10.57,38.52 12.09,40.05 15.19,40.05 16.2,41.06 20.47,41.06 v21.74,39.79 | v17.55,28.34 17.55,29.2 17.93,29.58 18.64,29.58 v18.69,29.63
  Route15 0.203: v15.55,30.64 15.6,30.69 15.6,31.14 15.82,31.36 16.71,31.36 v16.97,31.61
  Route15 0.254: v21.74,39.79 21.74,39.74 22.1,39.39 22.1,37.46 21.13,36.49 19.05,36.49 v19,36.54
  Bottom 0.14: v14.53,27.96 U$6.P$1 | v15.55,30.64 C45.2
  Bottom 0.152: 15.14,27.96 16.41,27.96 16.74,28.29 17.5,28.29 v17.55,28.34 17.27,28.69 C25.1 | 15.14,27.96 v14.53,27.96 | 15.14,27.96 15.55,28.37 v15.55,30.64 15.05,30.64 14.45,31.23 13.72,31.23 13.51,31.44 13.51,32.43 13.01,32.94 13.01,34 13.72,34.71 15.49,34.71 15.9,34.31 15.9,33.39 16.31,32.98 IMU1.P$13 | IMU1.P$8 19.71,32.02 19.46,31.77 19.46,30.24 | 19.46,30.24 19.46,29.94 19.15,29.63 v18.69,29.63 | IMU1.P$22 19.31,36.23 v19,36.54 | 19.46,30.24 19.91,30.7 20.62,30.7 21.34,31.41 21.34,34.93 21.29,34.98
  Bottom 0.203: BARO1.1 BARO1.2 24.26,35.25 23.62,34.61 21.79,34.61 21.42,34.98 21.29,34.98 IMU1.P$1
  Bottom 0.254: BARO1.1 24.22,36.5 23.32,37.41 23.32,38.93 22.45,39.79 v21.74,39.79 21.54,39.79 20.68,40.66 18.24,40.66 R7.2 R10.2
3.3V3  (via drill 0.2 pad 0.51)
  Top 0.14: C67.2 14.5,48.48 v14.53,48.5
  Top 0.152: C68.2 15.55,51.28 v15.55,51.18 | IC2.24 17.18,52.35 v16.97,52.15 | C59.1 14.63,49.47 14.53,49.37 v14.53,48.5 | LDO_VREG2.VOUT 18.68,50.19 v18.69,50.17 | IC2.30 18.75,56.83 v19,57.08
  Top 0.203: C57.2 10.87,59.47
  Top 0.254: 10.87,59.47 L2.1 10.13,59.34 v9.91,59.06 | v18.69,50.17 19.25,49.61 C49.1 19.63,48.83 R12.2
  Route2 0.254: v9.91,59.06 10.57,59.06 12.09,60.59 15.19,60.59 16.2,61.6 20.47,61.6 v21.74,60.33 | v17.55,48.88 17.55,49.74 17.93,50.12 18.64,50.12 v18.69,50.17
  Route15 0.203: v15.55,51.18 15.6,51.23 15.6,51.68 15.82,51.9 16.71,51.9 v16.97,52.15
  Route15 0.254: v21.74,60.33 21.74,60.28 22.1,59.93 22.1,58 21.13,57.03 19.05,57.03 v19,57.08
  Bottom 0.14: v14.53,48.5 U$28.P$1 | v15.55,51.18 C68.2
  Bottom 0.152: 15.14,48.5 16.41,48.5 16.74,48.83 17.5,48.83 v17.55,48.88 17.27,49.23 C52.1 | 15.14,48.5 v14.53,48.5 | 15.14,48.5 15.55,48.91 v15.55,51.18 15.05,51.18 14.45,51.77 13.72,51.77 13.51,51.98 13.51,52.97 13.01,53.48 13.01,54.54 13.72,55.25 15.49,55.25 15.9,54.85 15.9,53.93 16.31,53.53 IMU2.P$13 | IMU2.P$8 19.71,52.56 19.46,52.31 19.46,50.78 | 19.46,50.78 19.46,50.48 19.15,50.17 v18.69,50.17 | IMU2.P$22 19.31,56.77 v19,57.08 | 19.46,50.78 19.91,51.24 20.62,51.24 21.34,51.95 21.34,55.47 21.29,55.53
  Bottom 0.203: BARO2.1 BARO2.2 24.26,55.79 23.62,55.15 21.79,55.15 21.42,55.53 21.29,55.53 IMU2.P$1
  Bottom 0.254: BARO2.1 24.22,57.04 23.32,57.95 23.32,59.47 22.45,60.33 v21.74,60.33 21.54,60.33 20.68,61.2 18.24,61.2 R14.2 R15.2
3.3V4  (via drill 0.2 pad 0.51)
  Top 0.14: C90.2 14.5,69.02 v14.53,69.04
  Top 0.152: C91.2 15.55,71.82 v15.55,71.72 | IC3.24 17.18,72.89 v16.97,72.69 | C82.1 14.63,70.01 14.53,69.91 v14.53,69.04 | LDO_VREG3.VOUT 18.68,70.73 v18.69,70.71 | IC3.30 18.75,77.37 v19,77.62
  Top 0.203: C80.2 10.87,80.01
  Top 0.254: 10.87,80.01 L3.1 10.13,79.88 v9.91,79.6 | v18.69,70.71 19.25,70.15 C72.1 19.63,69.37 R17.2
  Route2 0.254: v9.91,79.6 10.57,79.6 12.09,81.13 15.19,81.13 16.2,82.14 20.47,82.14 v21.74,80.87 | v17.55,69.42 17.55,70.28 17.93,70.66 18.64,70.66 v18.69,70.71
  Route15 0.203: v15.55,71.72 15.6,71.77 15.6,72.22 15.82,72.44 16.71,72.44 v16.97,72.69
  Route15 0.254: v21.74,80.87 21.74,80.82 22.1,80.47 22.1,78.54 21.13,77.57 19.05,77.57 v19,77.62
  Bottom 0.14: v14.53,69.04 U$60.P$1 | v15.55,71.72 C91.2
  Bottom 0.152: 15.14,69.04 16.41,69.04 16.74,69.37 17.5,69.37 v17.55,69.42 17.27,69.77 C75.1 | 15.14,69.04 v14.53,69.04 | 15.14,69.04 15.55,69.45 v15.55,71.72 15.05,71.72 14.45,72.31 13.72,72.31 13.51,72.52 13.51,73.51 13.01,74.02 13.01,75.08 13.72,75.79 15.49,75.79 15.9,75.39 15.9,74.47 16.31,74.06 IMU3.P$13 | IMU3.P$8 19.71,73.1 19.46,72.85 19.46,71.32 | 19.46,71.32 19.46,71.02 19.15,70.71 v18.69,70.71 | IMU3.P$22 19.31,77.31 v19,77.62 | 19.46,71.32 19.91,71.78 20.62,71.78 21.34,72.49 21.34,76.01 21.29,76.06
  Bottom 0.203: BARO3.1 BARO3.2 24.26,76.33 23.62,75.69 21.79,75.69 21.42,76.06 21.29,76.06 IMU3.P$1
  Bottom 0.254: BARO3.1 24.22,77.58 23.32,78.49 23.32,80.01 22.45,80.87 v21.74,80.87 21.54,80.87 20.68,81.74 18.24,81.74 R19.2 R20.2
3.3V5  (via drill 0.2 pad 0.51)
  Top 0.14: C113.2 14.5,89.56 v14.53,89.58
  Top 0.152: C114.2 15.55,92.36 v15.55,92.26 | IC4.24 17.18,93.43 v16.97,93.23 | C105.1 14.63,90.55 14.53,90.45 v14.53,89.58 | LDO_VREG4.VOUT 18.68,91.27 v18.69,91.25 | IC4.30 18.75,97.91 v19,98.16
  Top 0.203: C103.2 10.87,100.55
  Top 0.254: 10.87,100.55 L4.1 10.13,100.42 v9.91,100.14 | v18.69,91.25 19.25,90.69 C95.1 19.63,89.91 R22.2
  Route2 0.254: v9.91,100.14 10.57,100.14 12.09,101.67 15.19,101.67 16.2,102.68 20.47,102.68 v21.74,101.41 | v17.55,89.96 17.55,90.82 17.93,91.2 18.64,91.2 v18.69,91.25
  Route15 0.203: v15.55,92.26 15.6,92.31 15.6,92.76 15.82,92.98 16.71,92.98 v16.97,93.23
  Route15 0.254: v21.74,101.41 21.74,101.36 22.1,101.01 22.1,99.08 21.13,98.11 19.05,98.11 v19,98.16
  Bottom 0.14: v14.53,89.58 U$79.P$1 | v15.55,92.26 C114.2
  Bottom 0.152: 15.14,89.58 16.41,89.58 16.74,89.91 17.5,89.91 v17.55,89.96 17.27,90.31 C98.1 | 15.14,89.58 v14.53,89.58 | 15.14,89.58 15.55,89.99 v15.55,92.26 15.05,92.26 14.45,92.85 13.72,92.85 13.51,93.06 13.51,94.05 13.01,94.56 13.01,95.62 13.72,96.33 15.49,96.33 15.9,95.93 15.9,95.01 16.31,94.61 IMU4.P$13 | IMU4.P$8 19.71,93.64 19.46,93.39 19.46,91.86 | 19.46,91.86 19.46,91.56 19.15,91.25 v18.69,91.25 | IMU4.P$22 19.31,97.85 v19,98.16 | 19.46,91.86 19.91,92.32 20.62,92.32 21.34,93.03 21.34,96.55 21.29,96.61
  Bottom 0.203: BARO4.1 BARO4.2 24.26,96.87 23.62,96.23 21.79,96.23 21.42,96.61 21.29,96.61 IMU4.P$1
  Bottom 0.254: BARO4.1 24.22,98.12 23.32,99.03 23.32,100.55 22.45,101.41 v21.74,101.41 21.54,101.41 20.68,102.28 18.24,102.28 R24.2 R25.2
ANT_OUT  (via drill 0.2 pad 0.51)
  Top 0.203: v11.61,14.66 11.46,14.71 11.3,14.86 11.3,15.54 BAL.1 | ANT1.1 8.53,11.89 v8.89,11.28
  Bottom 0.203: v8.89,11.28 8.99,11.23 arc114 11.23,12.6 11.23,14.28 v11.61,14.66
ANT_OUT1  (via drill 0.2 pad 0.51)
  Top 0.203: v11.61,35.2 11.46,35.25 11.3,35.4 11.3,36.08 BAL1.1 | ANT2.1 8.53,32.43 v8.89,31.82
  Bottom 0.203: v8.89,31.82 8.99,31.77 arc114 11.23,33.14 11.23,34.81 v11.61,35.2
ANT_OUT2  (via drill 0.2 pad 0.51)
  Top 0.203: v11.61,55.74 11.46,55.79 11.3,55.94 11.3,56.62 BAL2.1 | ANT3.1 8.53,52.97 v8.89,52.36
  Bottom 0.203: v8.89,52.36 8.99,52.31 arc114 11.23,53.68 11.23,55.36 v11.61,55.74
ANT_OUT3  (via drill 0.2 pad 0.51)
  Top 0.203: v11.61,76.28 11.46,76.33 11.3,76.48 11.3,77.16 BAL3.1 | ANT4.1 8.53,73.51 v8.89,72.9
  Bottom 0.203: v8.89,72.9 8.99,72.85 arc114 11.23,74.22 11.23,75.89 v11.61,76.28
ANT_OUT4  (via drill 0.2 pad 0.51)
  Top 0.203: v11.61,96.82 11.46,96.87 11.3,97.02 11.3,97.7 BAL4.1 | ANT5.1 8.53,94.05 v8.89,93.44
  Bottom 0.203: v8.89,93.44 8.99,93.39 arc114 11.23,94.76 11.23,96.44 v11.61,96.82
AVDD  (via drill 0.2 pad 0.51)
  Top 0.152: IC.5 15.18,16.55 v15.14,16.51
  Top 0.254: C17.1 v20.17,18.19
  Route2 0.254: v20.17,18.19 20.57,18.19 21.03,17.73 21.03,15.9 20.37,15.24 18.69,15.24 18.03,15.9 18.03,16.66 17.63,17.07 16.92,17.07 16.51,16.66 16.51,15.85 16.05,15.39 15.44,15.39 15.14,15.7 v15.14,16.51
AVDD1  (via drill 0.2 pad 0.51)
  Top 0.152: IC1.5 15.18,37.09 v15.14,37.05
  Top 0.254: C33.1 v20.17,38.73
  Route2 0.254: v20.17,38.73 20.57,38.73 21.03,38.27 21.03,36.44 20.37,35.78 18.69,35.78 18.03,36.44 18.03,37.2 17.63,37.61 16.92,37.61 16.51,37.2 16.51,36.39 16.05,35.93 15.44,35.93 15.14,36.24 v15.14,37.05
AVDD2  (via drill 0.2 pad 0.51)
  Top 0.152: IC2.5 15.18,57.63 v15.14,57.59
  Top 0.254: C56.1 v20.17,59.27
  Route2 0.254: v20.17,59.27 20.57,59.27 21.03,58.81 21.03,56.98 20.37,56.32 18.69,56.32 18.03,56.98 18.03,57.74 17.63,58.15 16.92,58.15 16.51,57.74 16.51,56.93 16.05,56.47 15.44,56.47 15.14,56.78 v15.14,57.59
AVDD3  (via drill 0.2 pad 0.51)
  Top 0.152: IC3.5 15.18,78.17 v15.14,78.13
  Top 0.254: C79.1 v20.17,79.81
  Route2 0.254: v20.17,79.81 20.57,79.81 21.03,79.35 21.03,77.52 20.37,76.86 18.69,76.86 18.03,77.52 18.03,78.28 17.63,78.69 16.92,78.69 16.51,78.28 16.51,77.47 16.05,77.01 15.44,77.01 15.14,77.32 v15.14,78.13
AVDD4  (via drill 0.2 pad 0.51)
  Top 0.152: IC4.5 15.18,98.71 v15.14,98.67
  Top 0.254: C102.1 v20.17,100.35
  Route2 0.254: v20.17,100.35 20.57,100.35 21.03,99.89 21.03,98.06 20.37,97.4 18.69,97.4 18.03,98.06 18.03,98.82 17.63,99.23 16.92,99.23 16.51,98.82 16.51,98.01 16.05,97.55 15.44,97.55 15.14,97.86 v15.14,98.67
DVDD
  Top 0.14: IC.21 15.68,11.45 C2.1
DVDD1
  Top 0.14: IC1.21 15.68,31.99 C19.1
DVDD2
  Top 0.14: IC2.21 15.68,52.53 C48.1
DVDD3
  Top 0.14: IC3.21 15.68,73.07 C71.1
DVDD4
  Top 0.14: IC4.21 15.68,93.61 C94.1
GND  (via drill 0.2 pad 0.51)
  Top 0.14: IC.14 12.8,14.28 | 14.68,14.53 15.15,15 IC.33 | 11.32,13.92 BAL.6 | 11.51,12.12 11.79,11.83 C4.2 | C3.1 11.4,9.92 XOSC.4 | v16.35,10.1 C30.1 16.3,10.62 16.15,10.77 16,10.77 | 16,10.77 14.73,10.77 XOSC.2 | C2.2 16.33,11.09 16,10.77 | 18.44,10.16 18.39,10.11
  Top 0.152: 12.8,14.28 14.02,14.28 14.28,14.53 14.68,14.53 | IC.14 12.02,14.25 11.68,13.92 11.32,13.92 | 13.85,20.37 C14.1 | XOSCRF.4 XOSCRF.2 | C3.1 10.46,10.86 10.46,11.07 11.51,12.12 11.23,12.4 11.23,12.75 11.16,12.82 C13.2 | C31.1 13.8,8.26 C10.2 13.9,8.69 14.1,8.89 15.21,8.89 C6.2 | C7.2 15.27,7.7 15.24,7.72 C6.2 | IC.11 13.25,15.75 13.72,15.29 15.14,15.29 IC.33 | IC.6 14.68,16.91 14.58,16.82 14.58,16.26 14.68,16.15 14.68,15.75 IC.33 | IC.3 16.18,17.15 16.31,17.02 16.31,16.51 16,16.2 16,15.58 IC.33 | LDO_VREG.GND 18.74,7.21 v18.75,7.21 | BTN.2 21.87,8.21 v21.84,8.18 | C9.2 19.5,17.37 20.02,17.37 20.27,17.12 20.27,15.39 19.63,14.75 IC.28 17.71,14.75 17.32,15.14 17.32,15.65 v17.22,15.75 16.17,15.75 IC.33 | C6.2 15.24,9.27 14.37,10.14 XOSC.2
  Top 0.203: ANT1.3 8.76,14.83 8.91,14.68 10.44,14.68 | BAL.5 10.67,14.45 10.44,14.68 | BAL.2 10.67,14.91 10.44,14.68 | BAL.5 10.67,12.85 C13.2 | BAL.5 BAL.6 | C21.1 C22.1 | 18.39,10.11 17.73,10.11 | 17.73,10.11 16.36,10.11 v16.35,10.1 | 18.44,10.16 FB1.2 | 18.39,7.32 LDO_VREG.GND 17.28,7.21 16.99,7.49 16.99,9.37 17.73,10.11
  Top 0.254: C21.1 12.78,20.04 13.11,20.37 13.85,20.37 | C14.1 14.88,20.47 XOSCRF.4 | XOSCRF.2 17.74,18.83 C15.2 19.34,18.19 C17.2 | C17.2 19.46,18.79 C8.2 19.71,19.46 19.86,19.61 20.82,19.61 LED2.C | C17.2 19.48,18.17 C9.2 | C1.2 21.42,7.75 v21.84,8.18 | C5.2 18.24,7.21 LDO_VREG.GND
  Route15 0.203: U$2.P$1 15.6,7.71 15.34,7.98 15.34,8.71 15.55,8.92 15.57,8.92 16.35,9.7 v16.35,10.1
  Bottom 0.14: XOSC.4 12.19,9.6 arc46 XOSC.2 | C30.1 v16.35,10.1 17.05,10.1 C29.2
  Bottom 0.152: IMU.P$20 18.51,15.63 18.39,15.75 v17.22,15.75 | BARO.5 BARO.4 | BARO.3 BARO.4 | C32.2 24.3,12 BARO.4
  Bottom 0.203: SJ1.1 14.61,12.45 15.65,11.4 C2.2
  Bottom 0.254: v18.75,7.21 19.1,7.21 19.51,7.62 21.29,7.62 v21.84,8.18 21.87,8.21 BTN.2 24.3,10.66 C32.2
  other vias: 11.43,9.72 14.12,10.14 11.79,11.64 10.7,10.62 16.33,11.4
GND1  (via drill 0.2 pad 0.51)
  Top 0.14: IC1.14 12.8,34.81 | 14.68,35.07 15.15,35.54 IC1.33 | 11.32,34.46 BAL1.6 | 11.51,32.66 11.79,32.37 C38.2 | C37.1 11.4,30.46 XOSC1.4 | v16.35,30.64 C45.1 16.3,31.16 16.15,31.31 16,31.31 | 16,31.31 14.73,31.31 XOSC1.2 | C19.2 16.33,31.63 16,31.31 | 18.44,30.7 18.39,30.65
  Top 0.152: 12.8,34.81 14.02,34.81 14.28,35.07 14.68,35.07 | IC1.14 12.02,34.79 11.68,34.46 11.32,34.46 | 13.85,40.91 C42.1 | XOSCRF1.4 XOSCRF1.2 | C37.1 10.46,31.4 10.46,31.61 11.51,32.66 11.23,32.94 11.23,33.29 11.16,33.36 C41.2 | C44.1 13.8,28.79 C36.2 13.9,29.23 14.1,29.43 15.21,29.43 C23.2 | C24.2 15.27,28.23 15.24,28.26 C23.2 | IC1.11 13.25,36.29 13.72,35.83 15.14,35.83 IC1.33 | IC1.6 14.68,37.45 14.58,37.36 14.58,36.8 14.68,36.69 14.68,36.29 IC1.33 | IC1.3 16.18,37.69 16.31,37.56 16.31,37.05 16,36.75 16,36.12 IC1.33 | LDO_VREG1.GND 18.74,27.74 v18.75,27.75 | BTN1.2 21.87,28.74 v21.84,28.72 | C27.2 19.5,37.91 20.02,37.91 20.27,37.66 20.27,35.93 19.63,35.29 IC1.28 17.71,35.29 17.32,35.68 17.32,36.19 v17.22,36.29 16.17,36.29 IC1.33 | C23.2 15.24,29.81 14.37,30.68 XOSC1.2
  Top 0.203: ANT2.3 8.76,35.37 8.91,35.22 10.44,35.22 | BAL1.5 10.67,34.99 10.44,35.22 | BAL1.2 10.67,35.45 10.44,35.22 | BAL1.5 10.67,33.39 C41.2 | BAL1.5 BAL1.6 | C34.1 C35.1 | 18.39,30.65 17.73,30.65 | 17.73,30.65 16.36,30.65 v16.35,30.64 | 18.44,30.7 FB2.2 | 18.39,27.86 LDO_VREG1.GND 17.28,27.74 16.99,28.03 16.99,29.91 17.73,30.65
  Top 0.254: C34.1 12.78,40.58 13.11,40.91 13.85,40.91 | C42.1 14.88,41.01 XOSCRF1.4 | XOSCRF1.2 17.74,39.37 C43.2 19.34,38.73 C33.2 | C33.2 19.46,39.34 C26.2 19.71,40 19.86,40.15 20.82,40.15 LED1.C | C33.2 19.48,38.71 C27.2 | C18.2 21.42,28.29 v21.84,28.72 | C20.2 18.24,27.74 LDO_VREG1.GND
  Route15 0.203: U$4.P$1 15.6,28.25 15.34,28.52 15.34,29.25 15.55,29.45 15.57,29.45 16.35,30.24 v16.35,30.64
  Bottom 0.14: XOSC1.4 12.19,30.14 arc46 XOSC1.2 | C45.1 v16.35,30.64 17.05,30.64 C25.2
  Bottom 0.152: IMU1.P$20 18.51,36.17 18.39,36.29 v17.22,36.29 | BARO1.5 BARO1.4 | BARO1.3 BARO1.4 | C46.2 24.3,32.54 BARO1.4
  Bottom 0.203: SJ2.1 14.61,32.99 15.65,31.95 C19.2
  Bottom 0.254: v18.75,27.75 19.1,27.75 19.51,28.16 21.29,28.16 v21.84,28.72 21.87,28.74 BTN1.2 24.3,31.2 C46.2
  other vias: 11.43,30.26 14.12,30.68 11.79,32.18 10.7,31.16 16.33,31.94
GND2  (via drill 0.2 pad 0.51)
  Top 0.14: IC2.14 12.8,55.36 | 14.68,55.61 15.15,56.08 IC2.33 | 11.32,55 BAL2.6 | 11.51,53.2 11.79,52.91 C61.2 | C60.1 11.4,51 XOSC2.4 | v16.35,51.18 C68.1 16.3,51.7 16.15,51.85 16,51.85 | 16,51.85 14.73,51.85 XOSC2.2 | C48.2 16.33,52.17 16,51.85 | 18.44,51.24 18.39,51.19
  Top 0.152: 12.8,55.36 14.02,55.36 14.28,55.61 14.68,55.61 | IC2.14 12.02,55.33 11.68,55 11.32,55 | 13.85,61.45 C65.1 | XOSCRF2.4 XOSCRF2.2 | C60.1 10.46,51.94 10.46,52.15 11.51,53.2 11.23,53.48 11.23,53.83 11.16,53.9 C64.2 | C67.1 13.8,49.34 C59.2 13.9,49.77 14.1,49.97 15.21,49.97 C50.2 | C51.2 15.27,48.78 15.24,48.8 C50.2 | IC2.11 13.25,56.83 13.72,56.37 15.14,56.37 IC2.33 | IC2.6 14.68,57.99 14.58,57.9 14.58,57.34 14.68,57.23 14.68,56.83 IC2.33 | IC2.3 16.18,58.23 16.31,58.1 16.31,57.59 16,57.29 16,56.66 IC2.33 | LDO_VREG2.GND 18.74,48.29 v18.75,48.29 | BTN2.2 21.87,49.29 v21.84,49.26 | C54.2 19.5,58.45 20.02,58.45 20.27,58.2 20.27,56.47 19.63,55.83 IC2.28 17.71,55.83 17.32,56.22 17.32,56.73 v17.22,56.83 16.17,56.83 IC2.33 | C50.2 15.24,50.35 14.37,51.22 XOSC2.2
  Top 0.203: ANT3.3 8.76,55.91 8.91,55.76 10.44,55.76 | BAL2.5 10.67,55.53 10.44,55.76 | BAL2.2 10.67,55.99 10.44,55.76 | BAL2.5 10.67,53.93 C64.2 | BAL2.5 BAL2.6 | C57.1 C58.1 | 18.39,51.19 17.73,51.19 | 17.73,51.19 16.36,51.19 v16.35,51.18 | 18.44,51.24 FB3.2 | 18.39,48.4 LDO_VREG2.GND 17.28,48.29 16.99,48.57 16.99,50.45 17.73,51.19
  Top 0.254: C57.1 12.78,61.12 13.11,61.45 13.85,61.45 | C65.1 14.88,61.55 XOSCRF2.4 | XOSCRF2.2 17.74,59.91 C66.2 19.34,59.27 C56.2 | C56.2 19.46,59.88 C53.2 19.71,60.54 19.86,60.69 20.82,60.69 LED3.C | C56.2 19.48,59.25 C54.2 | C47.2 21.42,48.83 v21.84,49.26 | C49.2 18.24,48.29 LDO_VREG2.GND
  Route15 0.203: U$27.P$1 15.6,48.79 15.34,49.06 15.34,49.79 15.55,50 15.57,50 16.35,50.78 v16.35,51.18
  Bottom 0.14: XOSC2.4 12.19,50.68 arc46 XOSC2.2 | C68.1 v16.35,51.18 17.05,51.18 C52.2
  Bottom 0.152: IMU2.P$20 18.51,56.71 18.39,56.83 v17.22,56.83 | BARO2.5 BARO2.4 | BARO2.3 BARO2.4 | C69.2 24.3,53.08 BARO2.4
  Bottom 0.203: SJ3.1 14.61,53.53 15.65,52.48 C48.2
  Bottom 0.254: v18.75,48.29 19.1,48.29 19.51,48.7 21.29,48.7 v21.84,49.26 21.87,49.29 BTN2.2 24.3,51.74 C69.2
  other vias: 11.43,50.8 14.12,51.22 11.79,52.72 10.7,51.7 16.33,52.48
GND3  (via drill 0.2 pad 0.51)
  Top 0.14: IC3.14 12.8,75.89 | 14.68,76.15 15.15,76.62 IC3.33 | 11.32,75.54 BAL3.6 | 11.51,73.74 11.79,73.45 C84.2 | C83.1 11.4,71.54 XOSC3.4 | v16.35,71.72 C91.1 16.3,72.24 16.15,72.39 16,72.39 | 16,72.39 14.73,72.39 XOSC3.2 | C71.2 16.33,72.71 16,72.39 | 18.44,71.78 18.39,71.73
  Top 0.152: 12.8,75.89 14.02,75.89 14.28,76.15 14.68,76.15 | IC3.14 12.02,75.87 11.68,75.54 11.32,75.54 | 13.85,81.99 C88.1 | XOSCRF3.4 XOSCRF3.2 | C83.1 10.46,72.48 10.46,72.69 11.51,73.74 11.23,74.02 11.23,74.37 11.16,74.44 C87.2 | C90.1 13.8,69.88 C82.2 13.9,70.31 14.1,70.51 15.21,70.51 C73.2 | C74.2 15.27,69.31 15.24,69.34 C73.2 | IC3.11 13.25,77.37 13.72,76.91 15.14,76.91 IC3.33 | IC3.6 14.68,78.53 14.58,78.44 14.58,77.88 14.68,77.77 14.68,77.37 IC3.33 | IC3.3 16.18,78.77 16.31,78.64 16.31,78.13 16,77.83 16,77.2 IC3.33 | LDO_VREG3.GND 18.74,68.83 v18.75,68.83 | BTN3.2 21.87,69.83 v21.84,69.8 | C77.2 19.5,78.99 20.02,78.99 20.27,78.74 20.27,77.01 19.63,76.37 IC3.28 17.71,76.37 17.32,76.76 17.32,77.27 v17.22,77.37 16.17,77.37 IC3.33 | C73.2 15.24,70.89 14.37,71.76 XOSC3.2
  Top 0.203: ANT4.3 8.76,76.45 8.91,76.3 10.44,76.3 | BAL3.5 10.67,76.07 10.44,76.3 | BAL3.2 10.67,76.53 10.44,76.3 | BAL3.5 10.67,74.47 C87.2 | BAL3.5 BAL3.6 | C80.1 C81.1 | 18.39,71.73 17.73,71.73 | 17.73,71.73 16.36,71.73 v16.35,71.72 | 18.44,71.78 FB4.2 | 18.39,68.94 LDO_VREG3.GND 17.28,68.83 16.99,69.11 16.99,70.99 17.73,71.73
  Top 0.254: C80.1 12.78,81.66 13.11,81.99 13.85,81.99 | C88.1 14.88,82.09 XOSCRF3.4 | XOSCRF3.2 17.74,80.45 C89.2 19.34,79.81 C79.2 | C79.2 19.46,80.42 C76.2 19.71,81.08 19.86,81.23 20.82,81.23 LED4.C | C79.2 19.48,79.79 C77.2 | C70.2 21.42,69.37 v21.84,69.8 | C72.2 18.24,68.83 LDO_VREG3.GND
  Route15 0.203: U$59.P$1 15.6,69.33 15.34,69.6 15.34,70.33 15.55,70.53 15.57,70.53 16.35,71.32 v16.35,71.72
  Bottom 0.14: XOSC3.4 12.19,71.22 arc46 XOSC3.2 | C91.1 v16.35,71.72 17.05,71.72 C75.2
  Bottom 0.152: IMU3.P$20 18.51,77.25 18.39,77.37 v17.22,77.37 | BARO3.5 BARO3.4 | BARO3.3 BARO3.4 | C92.2 24.3,73.62 BARO3.4
  Bottom 0.203: SJ4.1 14.61,74.07 15.65,73.03 C71.2
  Bottom 0.254: v18.75,68.83 19.1,68.83 19.51,69.24 21.29,69.24 v21.84,69.8 21.87,69.83 BTN3.2 24.3,72.28 C92.2
  other vias: 11.43,71.34 14.12,71.76 11.79,73.26 10.7,72.24 16.33,73.02
GND4  (via drill 0.2 pad 0.51)
  Top 0.14: IC4.14 12.8,96.44 | 14.68,96.69 15.15,97.16 IC4.33 | 11.32,96.08 BAL4.6 | 11.51,94.28 11.79,93.99 C107.2 | C106.1 11.4,92.08 XOSC4.4 | v16.35,92.26 C114.1 16.3,92.78 16.15,92.93 16,92.93 | 16,92.93 14.73,92.93 XOSC4.2 | C94.2 16.33,93.25 16,92.93 | 18.44,92.32 18.39,92.27
  Top 0.152: 12.8,96.44 14.02,96.44 14.28,96.69 14.68,96.69 | IC4.14 12.02,96.41 11.68,96.08 11.32,96.08 | 13.85,102.53 C111.1 | XOSCRF4.4 XOSCRF4.2 | C106.1 10.46,93.02 10.46,93.23 11.51,94.28 11.23,94.56 11.23,94.91 11.16,94.98 C110.2 | C113.1 13.8,90.42 C105.2 13.9,90.85 14.1,91.05 15.21,91.05 C96.2 | C97.2 15.27,89.86 15.24,89.88 C96.2 | IC4.11 13.25,97.91 13.72,97.45 15.14,97.45 IC4.33 | IC4.6 14.68,99.07 14.58,98.98 14.58,98.42 14.68,98.31 14.68,97.91 IC4.33 | IC4.3 16.18,99.31 16.31,99.18 16.31,98.67 16,98.37 16,97.74 IC4.33 | LDO_VREG4.GND 18.74,89.37 v18.75,89.37 | BTN4.2 21.87,90.37 v21.84,90.34 | C100.2 19.5,99.53 20.02,99.53 20.27,99.28 20.27,97.55 19.63,96.91 IC4.28 17.71,96.91 17.32,97.3 17.32,97.81 v17.22,97.91 16.17,97.91 IC4.33 | C96.2 15.24,91.43 14.37,92.3 XOSC4.2
  Top 0.203: ANT5.3 8.76,96.99 8.91,96.84 10.44,96.84 | BAL4.5 10.67,96.61 10.44,96.84 | BAL4.2 10.67,97.07 10.44,96.84 | BAL4.5 10.67,95.01 C110.2 | BAL4.5 BAL4.6 | C103.1 C104.1 | 18.39,92.27 17.73,92.27 | 17.73,92.27 16.36,92.27 v16.35,92.26 | 18.44,92.32 FB5.2 | 18.39,89.48 LDO_VREG4.GND 17.28,89.37 16.99,89.65 16.99,91.53 17.73,92.27
  Top 0.254: C103.1 12.78,102.2 13.11,102.53 13.85,102.53 | C111.1 14.88,102.63 XOSCRF4.4 | XOSCRF4.2 17.74,100.99 C112.2 19.34,100.35 C102.2 | C102.2 19.46,100.95 C99.2 19.71,101.62 19.86,101.77 20.82,101.77 LED5.C | C102.2 19.48,100.33 C100.2 | C93.2 21.42,89.91 v21.84,90.34 | C95.2 18.24,89.37 LDO_VREG4.GND
  Route15 0.203: U$78.P$1 15.6,89.87 15.34,90.14 15.34,90.87 15.55,91.08 15.57,91.08 16.35,91.86 v16.35,92.26
  Bottom 0.14: XOSC4.4 12.19,91.76 arc46 XOSC4.2 | C114.1 v16.35,92.26 17.05,92.26 C98.2
  Bottom 0.152: IMU4.P$20 18.51,97.79 18.39,97.91 v17.22,97.91 | BARO4.5 BARO4.4 | BARO4.3 BARO4.4 | C115.2 24.3,94.16 BARO4.4
  Bottom 0.203: SJ5.1 14.61,94.61 15.65,93.56 C94.2
  Bottom 0.254: v18.75,89.37 19.1,89.37 19.51,89.78 21.29,89.78 v21.84,90.34 21.87,90.37 BTN4.2 24.3,92.82 C115.2
  other vias: 11.43,91.88 14.12,92.3 11.79,93.8 10.7,92.78 16.33,93.56
N$1
  Top 0.203: BAL.3 10.02,16.46 C11.2
N$2  (via drill 0.2 pad 0.51)
  Top 0.203: ANT1.2 9.14,12.78 ANT1.2 9.14,12.04 arc48 9.2,11.84 arc42 9.45,11.58 arc90 10.69,11.91 C13.1
  other vias: 9.14,12.75
N$3
  Top 0.203: BAL.4 10.02,12.71 C12.2
N$4
  Bottom 0.203: 23.58,11.02 C32.1 | IMU.P$10 18.91,10.45
  Bottom 0.254: 18.91,10.45 18.91,9.92 18.69,9.7 18.24,9.7 17.93,9.4 17.93,8.69 18.24,8.38 20.99,8.38 C32.1
N$5
  Top 0.203: FB1.1 20.89,10.08 USB.6 | 23.9,15.4 USB.9
  Top 0.381: USB.5 23.9,15.4 arc-90 USB.9
  Top 0.508: 24,17.7 USB.10 | 24,10.5 USB.7
  Top 1.27: USB.11 USB.10 USB.9 USB.8 USB.7 USB.6
N$6
  pour Top (isolate 0.254): 9.65,18.41 9.65,17.58 12.45,17.58 12.45,13.28 arc-10 12.04,12.32 arc-10 10.77,11.18 arc-10 9.02,11.05 9.02,10.51 arc60 16.62,6.08 arc90 24.62,14.08 arc90 16.62,22.08 arc60